# Altium PCB MagicWandFinal.PcbDoc
Units mm, origin at the board's own origin, x right, y up, seen from the top; angles counter-clockwise.
Board outline 424.43 x 30.73 mm, 2 copper layers (Top Layer, Bottom Layer); 31 components, 28 nets, 101 pads, 75 vias.
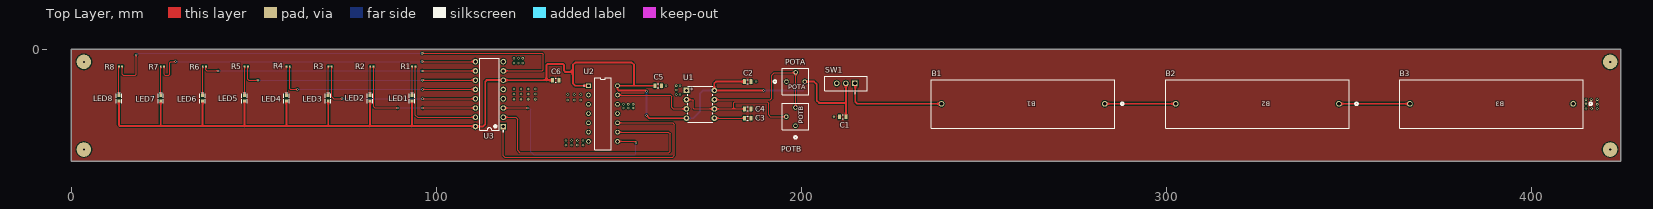
[diagram p0: Top Layer view]
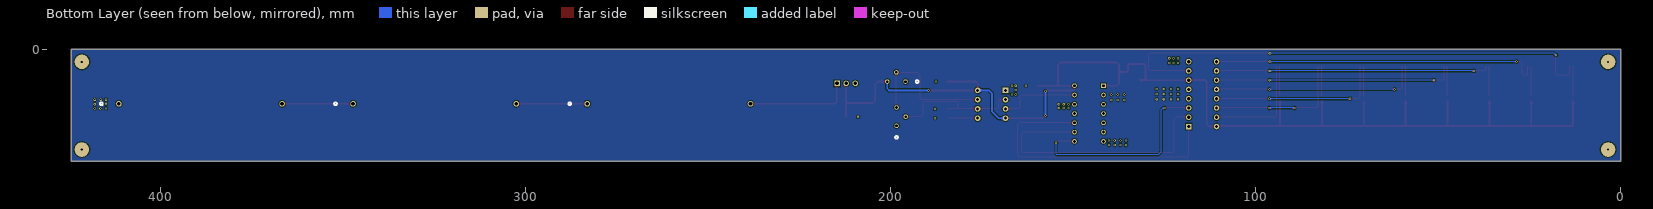
[diagram p1: Bottom Layer view, seen from below]
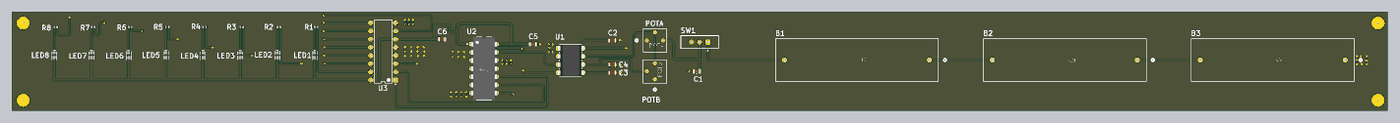
[diagram p2: 3D render of the assembled board from above, using the file's embedded part models]

## Layer stack, top to bottom
Top Solder: solder mask 0.0102, Solder Resist, Dk 3.5
Top Layer: signal copper 0.0356
Dielectric 1: dielectric 0.32, FR-4, Dk 4.8
Bottom Layer: signal copper 0.0356
Bottom Solder: solder mask 0.0102, Solder Resist, Dk 3.5

## Board outline
0,-30.734 0,0 424.434,0 424.434,-30.734

## Design rules (kind name [scope] priority, off if disabled: settings)
Clearance [All] p1: gap=0.254 ignorepadtopadclearanceinfootprint=FALSE
MinimumSolderMaskSliver [All] p1: minsoldermaskwidth=0.15
PolygonConnect [All] p1: connectstyle=Relief reliefconductorwidth=0.254 reliefentries=4 polygonreliefangle="90 Angle" airgapwidth=0.254
RoutingVias [All] p1: holewidth=0.711 width=1.27 viastyle="Through Hole" minholewidth=0.254 minwidth=0.508 maxholewidth=0.711 maxwidth=1.27
SolderMaskExpansion [All] p1: expansion=0.102 istentingtop=FALSE
SupplyNets "Schematic Supply Nets_1" [InNet('GND')] p1: voltage=0.000
SupplyNets "Schematic Supply Nets" [InNet('VCC')] p2: voltage=0.000
Width [All] p1: maxlimit=0.762 minlimit=0.254 preferedwidth=0.254
29 further rules are at their usual default settings.

## Components (designator, comment, footprint, x,y, rotation, side; value= is the part's Value field where it differs from the comment)
B1 "2466" 2466_KEY 283.083,-14.986 r180 top
B2 "2466" 2466_KEY 347.218,-14.986 r180 top
B3 "2466" 2466_KEY 411.353,-14.986 r180 top
C1 "Capacitor 47µF +/-40% 6.3V 0805" CAPC0805(2012)145_L 211.317,-18.542 r180 top value=47µF
C2 "Capacitor 47µF +/-40% 6.3V 0805" CAPC0805(2012)145_L 185.293,-8.89 r0 top value=0.1µF
C3 "Capacitor 47µF +/-40% 6.3V 0805" CAPC0805(2012)145_L 185.293,-18.923 r0 top value=0.1µF
C4 "Capacitor 47µF +/-40% 6.3V 0805" CAPC0805(2012)145_L 185.293,-16.383 r0 top value=0.1µF
C5 "Capacitor 47µF +/-40% 6.3V 0805" CAPC0805(2012)145_L 160.782,-10.033 r0 top value=0.1µF
C6 "Capacitor 47µF +/-40% 6.3V 0805" CAPC0805(2012)145_L 132.715,-8.509 r0 top value=0.1µF
LED1 "FC-DA1608HRK-620D" LED0603-RD_RED 93.345,-13.462 r270 top
LED2 "FC-DA1608HRK-620D" LED0603-RD_RED 81.879,-13.462 r270 top
LED3 "FC-DA1608HRK-620D" LED0603-RD_RED 70.412,-13.462 r270 top
LED4 "FC-DA1608HRK-620D" LED0603-RD_RED 58.946,-13.462 r270 top
LED5 "FC-DA1608HRK-620D" LED0603-RD_RED 47.48,-13.462 r270 top
LED6 "FC-DA1608HRK-620D" LED0603-RD_RED 36.014,-13.462 r270 top
LED7 "FC-DA1608HRK-620D" LED0603-RD_RED 24.547,-13.462 r270 top
LED8 "FC-DA1608HRK-620D" LED0603-RD_RED 13.081,-13.462 r270 top
POTA "100K" POT_CT-6EP103_NDC 195.914,-8.89 r0 top
POTB "100K" POT_CT-6EP103_NDC 198.374,-21.002 r90 top
R1 "Resistor 100R +/-1 % 0402 63 mW" RESC0402(1005)_L 93.853,-4.699 r180 top value=100
R2 "Resistor 100R +/-1 % 0402 63 mW" RESC0402(1005)_L 82.378,-4.699 r180 top value=100
R3 "Resistor 100R +/-1 % 0402 63 mW" RESC0402(1005)_L 70.904,-4.699 r180 top value=100
R4 "Resistor 100R +/-1 % 0402 63 mW" RESC0402(1005)_L 59.429,-4.699 r180 top value=100
R5 "Resistor 100R +/-1 % 0402 63 mW" RESC0402(1005)_L 47.955,-4.699 r180 top value=100
R6 "Resistor 100R +/-1 % 0402 63 mW" RESC0402(1005)_L 36.48,-4.699 r180 top value=100
R7 "Resistor 100R +/-1 % 0402 63 mW" RESC0402(1005)_L 25.006,-4.699 r180 top value=100
R8 "Resistor 100R +/-1 % 0402 63 mW" RESC0402(1005)_L 13.531,-4.699 r180 top value=100
SW1 "EG1218" ESWI-EG1218_V 212.177,-9.398 r180 top
U1 "LMC555CN/NOPB" N08E_TEX 168.529,-11.303 r0 top
U2 "SN74HC393N" FP-N0014A-MFG 145.669,-17.653 r0 top
U3 "CD74HC138E" N0016A 114.554,-12.319 r180 top

## Footprints (in the part's own frame and the unit in brackets; to place one, negate y for a bottom-side part, rotate by r counter-clockwise, add the part's x,y. Pads: shape width x height; smd on the part's side, far side on the other; paste and mask are expansions set on the pad)
2466_KEY [mil]
  round 60 hole 40 paste-99999 mask+0: 1(0,0) 2(1760,0)
  silkscreen extent -204,-261 1869,261
CAPC0805(2012)145_L [mm] "Chip Capacitor, Body 2.0x1.2mm, Height 1.45mm, IPC High Density"
  rrect25% 0.76x1.3 smd: 1(-0.9,0) 2(0.89,0)
  silkscreen extent -0.19,-0.55 0.18,0.55, body extent -1,-0.6 1,0.6, height 1.45
ESWI-EG1218_V [mm] "THD, 3-Leads, Body 11.6x4mm, Pitch 2.5mm"
  rect 1.5x1.5 hole 1: 1(-2.5,0)
  round 1.5 hole 1: 2(0,0) 3(2.5,0)
  silkscreen extent -5.8,-2 5.8,2.77, body extent -5.8,-2 5.8,2, height 7.4
FP-N0014A-MFG [mm]
  rect 1.25x1.25 hole 0.75 paste-2539.97 mask+0: 1(-3.97,7.62)
  round 1.25 hole 0.75 paste-2539.97 mask+0: 2(-3.97,5.08) 3(-3.97,2.54) 4(-3.97,0) 5(-3.97,-2.54) 6(-3.97,-5.08) 7(-3.97,-7.62) 8(3.97,-7.62) 9(3.97,-5.08) 10(3.97,-2.54) 11(3.97,0) 12(3.97,2.54) 13(3.97,5.08) 14(3.97,7.62)
  silkscreen extent -5.32,-9.84 2.3,9.84, body extent -4.69,-9.94 4.69,9.94, height 0.25
LED0603-RD_RED [mm]
  rect 0.8x0.8 smd paste+0.051: 1(-0.749,-0.003) 2(0.749,0.003)
  silkscreen extent -1.49,-0.75 1.39,0.76
N08E_TEX [mil]
  rect 60x60 / inner round 60 / far side rect 60x60 hole 32 paste-99999 mask+0: 1(0,0)
  round 60 hole 32 paste-99999 mask+0: 2(0,-100) 3(0,-200) 4(0,-300) 5(300,-300) 6(300,-200) 7(300,-100) 8(300,0)
  silkscreen extent 15,-345 285,45, body extent -5,-340 315,40, height 215
N0016A [mm] "DIP, 16-Leads, Body 19.7x6.6mm, Pitch 2.54mm"
  rect 1.5x1.5 hole 0.9: 1(-3.81,8.89)
  round 1.5 hole 0.9: 2(-3.81,6.35) 3(-3.81,3.81) 4(-3.81,1.27) 5(-3.81,-1.27) 6(-3.81,-3.81) 7(-3.81,-6.35) 8(-3.81,-8.89) 9(3.81,-8.89) 10(3.81,-6.35) 11(3.81,-3.81) 12(3.81,-1.27) 13(3.81,1.27) 14(3.81,3.81) 15(3.81,6.35) 16(3.81,8.89)
  silkscreen extent -3.94,-9.85 2.65,10.31, body extent -3.95,-9.85 3.95,9.85, height 5.08
POT_CT-6EP103_NDC [mil]
  round 48 hole 28 paste-99999 mask+0: 1(0,0) 2(98.43,98.43) 3(196.85,0)
  silkscreen extent -140,-143 241,143
RESC0402(1005)_L [mm] "Chip Resistor, Body 1.0x0.5mm, IPC High Density"
  rrect25% 0.5x0.55 smd: 1(-0.45,0) 2(0.45,0)
  body extent -0.5,-0.25 0.5,0.25, height 0.3

## Part data
B1 B2 B3: "Description", Manufacturer_Name="Keystone Electronics", Copyright="Copyright (C) 2025 Ultra Librarian. All rights reserved.", Manufacturer_Part_Number=2466
C1 C2 C3 C4 C5 C6: library part CMP-001-00082-4, "Chip Capacitor, 47µF +/-40%, 6.3V, 0805, Thickness 1.45 mm", Case/Package=0805, Max Operating Temperature=85°C, Min Operating Temperature=-55°C, Tolerance=10%, Voltage Rating=6.3V, Mounting Technology=SMT, Pins=2
POTA POTB: library part CT-6EP103, "Description", Manufacturer_Name="Nidec Copal Electronics", Copyright="Copyright (C) 2026 Ultra Librarian. All rights reserved.", Manufacturer_Part_Number=CT-6EP103, Type="Trimmer Potentiometers"
R1 R2 R3 R4 R5 R6 R7 R8: library part CMP-009-00167-3, "Chip Resistor, 100 Ohms, +/-1 %, 63 mW, -55 to 155 degC, 0402", Case/Package=0402, Max Operating Temperature=155°C, Min Operating Temperature=-55°C, Power=63mW, Tolerance=1%, Pins=2
SW1: library part CMP-1696-00002-1, "Slide Switch, 500 V, -20 to 70 degC, 3-Pin THD, RoHS", Case\Package=SOT-23-5, Dropout Voltage="300 mV", Max Input Voltage="8 V", Max Operating Temperature="85 degC", Max Ouput Current="150 mA", Max Power Dissipation="250 mW", Min Input Voltage="4.3 V", Min Operating Temperature="-40 degC", Nominal Output Voltage="3.3 V", Package Quantity=3000, ComponentLink1Description="Manufacturer URL", ComponentLink1URL=http://www.e-switch.ch/en/, ComponentLink2Description=Datasheet, ComponentLink2URL=https://www.e-switch.com/system/asset/product_line/data_sheet/119/EG.pdf, DatasheetVersion=Oct-15, Height="1.3 mm", Length="3 mm", Mount="Surface Mount", Output Current="150 mA", Output Voltage="3.3 V", Outputs=1, PackageDescription="3-Pin Through Hole Device, Body 11.6 x 4 mm, Pitch 2.5 mm", PackageReference=EG1218, Packaging="Tape and Reel", Pins=5, Power Rating="250 mW", Radiation Hardening=No, REACH SVHC="No SVHC", RoHSCompliant=true, Width="1.8 mm"
U1: library part LMC555CNNOPB, "Worldâ€™s smallest 555 timer with low power, high accuracy and a Fmax of 3MHz 8-PDIP -40 to 85", Manufacturer_Name="Texas Instruments", Copyright="Copyright (C) 2025 Ultra Librarian. All rights reserved.", Manufacturer_Part_Number=LMC555CN/NOPB, RefDes=RefDes, Type=Type
U2: library part CMP-1623-00479-3, "IC DUAL 4-BIT BIN CNTR 14-DIP", Case/Package=PDIP, Frequency=60MHz, Max Operating Temperature=85°C, Max Supply Voltage=6V, Min Operating Temperature=-40°C, Min Supply Voltage=2V, Operating Supply Voltage=5V, Package Quantity=25, Clock Edge Trigger Type="Negative Edge", Contact Plating=Gold, Direction=Up, Lead Free="Lead Free", Logic Function=Counter, Mount="Through Hole", Number of Bits=4, Number of Bits per Element=4, Number of Elements=2, Number of Pins=14, Packaging=Rail/Tube, Propagation Delay=360ns, Radiation Hardening=No, REACH SVHC="No SVHC", Reset=Asynchronous, RoHS Compliant=Yes, Series=74HC, Technology=CMOS, Turn-On Delay Time=360ns, Weight=0.032734oz
U3: library part CMP-1633-00630-2, "High Speed CMOS Logic 3-to-8 Line Decoder Demultiplexer Inverting and Non-Inverting, N0016A, TUBE", F @ Nom Voltage(Max)(Mhz)=28, Generic Part Number=CD74HC138, ICC @ Nom Voltage(Max)(mA)=0.08, Manufacturer="Texas Instruments", Operating Temperature Range(C)="-55 to 125", Rating=Catalog, tpd @ Nom Voltage(Max)(ns)=30, Voltage(Nom)(V)=3.3,5, Bits(#)=8, Channels(#)=1, Code_JEDEC=MS-001, Configuration=3：8, DatasheetVersion=SCHS147I, Function=Decoder/Demultiplexer, Input Type=LVTTL/CMOS, Output Drive (IOL/IOH)(Max)(mA)=5.2/-5.2, Output Type=CMOS, PackageReference=N0016A, Schmitt Trigger=No, Technology Family=HC, Type=Standard, VCC(Max)(V)=6, VCC(Min)(V)=2
LED1 LED2 LED3 LED4 LED5 LED6 LED7 LED8: Symbol=FC-DA1608HRK-620D

## Free pads (board coordinates)
  round 4 hole 0.6: 2(3.5,-3.5) 3(3.5,-27.5) 4(421.5,-3.5) 5(421.5,-27.5)

## Via types
v1: diameter 0.61, hole 0.305, Top Layer to Bottom Layer, 75 vias

## Nets (pads, with @x,y where several pads share a name; then routed paths per layer and width w, separated by ;. In a path a pad name is that pad's centre, name@x,y a point inside that pad or via, vN(x,y) a via of type N, cw(c..) or ccw(c..) an arc to the next point about the centre after c; other vN are vias at no path point)
A0: U2.10 U3.1 | length 79.4
  Top Layer w0.254: U3.1 118.364,-29.21 118.745,-29.591 164.719,-29.591 165.227,-29.083 165.227,-20.701 164.719,-20.193 U2.10
A1: U2.9 U3.2 | length 74.2
  Top Layer w0.254: U3.2 121.793,-18.669 122.301,-19.177 122.301,-27.686 122.936,-28.321 163.703,-28.321 164.084,-27.94 164.084,-23.241 163.576,-22.733 U2.9
A2: U2.8 U3.3 | length 56.6
  Top Layer w0.254: U3.3 v1(124.968,-16.129) ; U2.8 154.432,-25.273 v1@154.686,-25.527
  Bottom Layer w0.254: v1(124.968,-16.129) 125.036,-16.197 125.417,-16.197 125.857,-16.637 125.857,-28.067 126.746,-28.956 154.432,-28.956 154.686,-28.702 v1(154.686,-25.654)
GND: B3.1 C1.2 C2.2 C3.2 C4.2 C5.2 C6.2 U1.1 U2.2 U2.7 U2.12 U3.4 U3.5 U3.8
  other v1: 135.509,-26.289 137.075,-26.289 138.642,-26.289 140.208,-26.289 135.509,-25.019 137.075,-25.019 138.642,-25.019 140.208,-25.019 187.833,-18.923 208.915,-18.542 187.833,-16.383 414.909,-16.256 416.433,-16.256 417.957,-16.256 151.257,-16.129 152.59,-16.129 153.924,-16.129 151.257,-15.113 152.59,-15.113 153.924,-15.113 417.957,-15.113 414.909,-14.986 136.017,-13.97 137.795,-13.97 139.573,-13.97 414.909,-13.843 416.306,-13.843 417.957,-13.843 121.285,-13.716 123.232,-13.716 125.18,-13.716 127.127,-13.716 136.017,-12.446 137.795,-12.446 139.573,-12.446 165.735,-12.446 166.751,-12.446 121.285,-12.319 123.232,-12.319 125.18,-12.319 127.127,-12.319 165.735,-11.176 121.285,-10.922 123.232,-10.922 125.18,-10.922 127.127,-10.922 162.941,-10.033 165.735,-10.033 166.751,-10.033 187.579,-8.89 121.285,-3.81 122.492,-3.81 123.698,-3.81 121.285,-2.497 122.492,-2.497 123.698,-2.497
NetB1_1: B1.1 B2.2 | length 19.4
  Top Layer w0.508: B1.1 B2.2
NetB1_2: B1.2 SW1.1 | length 28.9
  Top Layer w0.508: SW1.1 214.757,-9.478 214.757,-14.478 215.265,-14.986 B1.2
NetB2_1: B2.1 B3.2 | length 19.4
  Top Layer w0.508: B2.1 B3.2
NetC3_1: C3.1 U1.5 | length 8.2
  Top Layer w0.254: U1.5 C3.1
NetC4_1: C4.1 POTB.2 U1.2 U1.6 | length 37.8
  Top Layer w0.254: U1.2 170.18,-13.843 170.434,-14.097 170.434,-16.234 170.583,-16.383 U1.6 181.483,-16.383 ; C4.1 181.483,-16.383 ; POTB.2 191.476,-18.502 191.008,-18.034 191.008,-14.859 190.627,-14.478 181.737,-14.478 181.483,-14.732 181.483,-16.383
NetLED1_1: LED1.1 R1.2 | length 8
  Top Layer w0.254: LED1.1 93.403,-12.652 R1.2
NetLED2_1: LED2.1 R2.2 | length 8
  Top Layer w0.254: LED2.1 81.928,-12.66 R2.2
NetLED3_1: LED3.1 R3.2 | length 8
  Top Layer w0.254: LED3.1 70.454,-12.668 R3.2
NetLED4_1: LED4.1 R4.2 | length 8
  Top Layer w0.254: LED4.1 58.979,-12.676 R4.2
NetLED5_1: LED5.1 R5.2 | length 8
  Top Layer w0.254: LED5.1 47.505,-12.685 R5.2
NetLED6_1: LED6.1 R6.2 | length 8
  Top Layer w0.254: LED6.1 36.03,-12.693 R6.2
NetLED7_1: LED7.1 R7.2 | length 8
  Top Layer w0.254: LED7.1 24.556,-12.701 R7.2
NetLED8_1: LED8.1 R8.2 | length 8
  Top Layer w0.254: LED8.1 13.081,-12.71 R8.2
NetPOTA_2: POTA.2 POTB.3 U1.7 | length 38.7
  Top Layer w0.254: U1.7 191.516,-13.843 191.897,-13.462 191.897,-7.112 192.532,-6.477 198.327,-6.477 POTA.2 198.394,-6.41 198.394,-15.982 POTB.3
NetR1_1: R1.1 U3.15 | length 30.1
  Top Layer w0.254: R1.1 94.303,-18.103 94.869,-18.669 U3.15
NetR2_1: R2.1 U3.14 | length 39.1
  Top Layer w0.254: R2.1 82.828,-15.772 83.185,-16.129 v1(89.408,-16.129) ; v1(96.266,-16.129) U3.14
  Bottom Layer w0.254: v1(89.408,-16.129) v1(96.266,-16.129)
NetR3_1: R3.1 U3.13 | length 48
  Top Layer w0.254: R3.1 71.354,-13.061 71.882,-13.589 v1(74.168,-13.589) ; v1(96.266,-13.589) U3.13
  Bottom Layer w0.254: v1(74.168,-13.589) v1(96.266,-13.589)
NetR4_1: R4.1 U3.12 | length 57.1
  Top Layer w0.254: R4.1 59.879,-10.857 60.071,-11.049 v1(61.976,-11.049) ; v1(96.266,-11.049) U3.12
  Bottom Layer w0.254: v1(61.976,-11.049) v1(96.266,-11.049)
NetR5_1: R5.1 U3.11 | length 66
  Top Layer w0.254: R5.1 48.387,-4.717 48.387,-8.255 48.641,-8.509 v1(51.181,-8.509) ; v1(96.266,-8.509) U3.11
  Bottom Layer w0.254: v1(51.181,-8.509) v1(96.266,-8.509)
NetR6_1: R6.1 U3.10 | length 74.9
  Top Layer w0.254: R6.1 36.93,-5.688 37.211,-5.969 v1(40.259,-5.969) ; v1(96.139,-5.969) U3.10
  Bottom Layer w0.254: v1(40.259,-5.969) v1(96.139,-5.969)
NetR7_1: R7.1 U3.9 | length 91
  Top Layer w0.254: R7.1 25.456,-6.914 25.654,-7.112 26.797,-7.112 27.051,-6.858 27.051,-3.683 27.305,-3.429 v1(28.575,-3.429) ; v1(96.139,-3.429) U3.9
  Bottom Layer w0.254: v1(28.575,-3.429) v1(96.139,-3.429)
NetR8_1: R8.1 U3.7 | length 138.6
  Top Layer w0.254: R8.1 13.97,-4.71 13.97,-6.858 14.224,-7.112 17.526,-7.112 17.78,-6.858 v1(17.78,-1.651) ; v1(96.139,-1.143) 129.032,-1.143 129.286,-1.397 129.286,-5.715 129.032,-5.969 U3.7
  Bottom Layer w0.254: v1(17.78,-1.651) 18.288,-1.143 v1(96.139,-1.143)
output: U1.3 U2.13 | length 22.2
  Top Layer w0.254: U2.13 164.084,-12.573 164.465,-12.954 164.465,-15.875 164.973,-16.383 U1.3
VCC: C1.1 C2.1 C5.1 C6.1 LED1.2 LED2.2 LED3.2 LED4.2 LED5.2 LED6.2 LED7.2 LED8.2 POTA.3 SW1.2 U1.4 U1.8 U2.1 U2.14 U3.6 U3.16 | length 345.5
  Top Layer w0.508: LED8.2 13.084,-20.784 13.382,-21.082 24.765,-21.082 ; LED7.2 24.551,-20.868 24.765,-21.082 ; LED6.2 36.017,-20.904 36.195,-21.082 ; LED5.2 47.483,-20.97 47.371,-21.082 ; LED4.2 58.95,-21.06 58.928,-21.082 ; LED3.2 70.416,-21.013 70.485,-21.082 ; LED2.2 81.882,-20.988 81.788,-21.082 ; LED1.2 93.348,-21.079 93.345,-21.082 ; U3.6 113.792,-8.509 113.411,-8.89 113.411,-20.574 112.776,-21.209 U3.16 110.617,-21.082 93.345,-21.082 ; U3.6@118.382,-8.527 130.175,-8.527 ; C6.1@131.815,-8.382 131.815,-8.401 131.689,-8.527 130.175,-8.527 ; U2.1 138.049,-10.033 137.414,-9.398 137.414,-6.223 ; U2.14 149.639,-11.005 149.937,-11.303 157.326,-11.303 157.58,-11.557 v1(157.607,-11.557) ; U2.14@149.86,-10.033 154.305,-10.033 ; v1(157.607,-18.161) 158.369,-18.923 U1.4 ; C5.1 154.305,-10.033 ; C2.1 176.657,-8.89 176.149,-9.398 U1.8 v1(189.611,-11.303) ; POTA.3 203.454,-8.89 204.216,-9.652 204.216,-14.097 204.851,-14.732 212.07,-14.732 212.197,-14.605 ; SW1.2 212.197,-9.418 212.197,-14.605 ; C1.1 212.197,-18.522 212.197,-14.605 ; 24.765,-21.082 36.195,-21.082 ; 36.195,-21.082 47.371,-21.082 ; 47.371,-21.082 58.928,-21.082 ; 58.928,-21.082 70.485,-21.082 ; 70.485,-21.082 81.788,-21.082 ; 81.788,-21.082 93.345,-21.082 ; 130.175,-8.527 130.175,-4.362 130.473,-4.064 134.703,-4.064 135.001,-4.362 135.001,-5.925 135.299,-6.223 137.414,-6.223 ; 137.414,-6.223 137.414,-4.318 138.049,-3.683 153.543,-3.683 154.178,-4.318 154.178,-9.906 154.305,-10.033
  Bottom Layer w0.508: v1(157.607,-18.161) v1(157.607,-11.557) ; U1.4 170.434,-18.923 172.212,-17.145 172.212,-12.192 173.101,-11.303 U1.8 ; v1(189.611,-11.303) 200.406,-11.303 200.914,-10.795 POTA.3
pads on no net: POTA.1 POTB.1 SW1.3 U2.3 U2.4 U2.5 U2.6 U2.11

## Polygon pours and split planes (outlines as drawn)
GND on Top Layer "GND_L01_P000" (solid, pour order 0): 0.127,-0.127 0.127,-30.607 424.307,-30.607 424.307,-0.127
GND on Bottom Layer "GND_L02_P001" (solid, pour order 1): 0.127,-0.127 424.307,-0.127 424.307,-30.607 0.127,-30.607

## Silkscreen, mask and mechanical layers (free items; w line width, h text height)
Mechanical 1:
  the board outline again, w0.254

## Text inside footprints (layer, text, board x,y; h text height)
U1: Mechanical 13 "*" at 168.974,-11.938 h1.27; Top Overlay "*" at 169.583,-11.785 h1.27